# EAGLE board scheda_trasduttori (EAGLE 6.5.0)
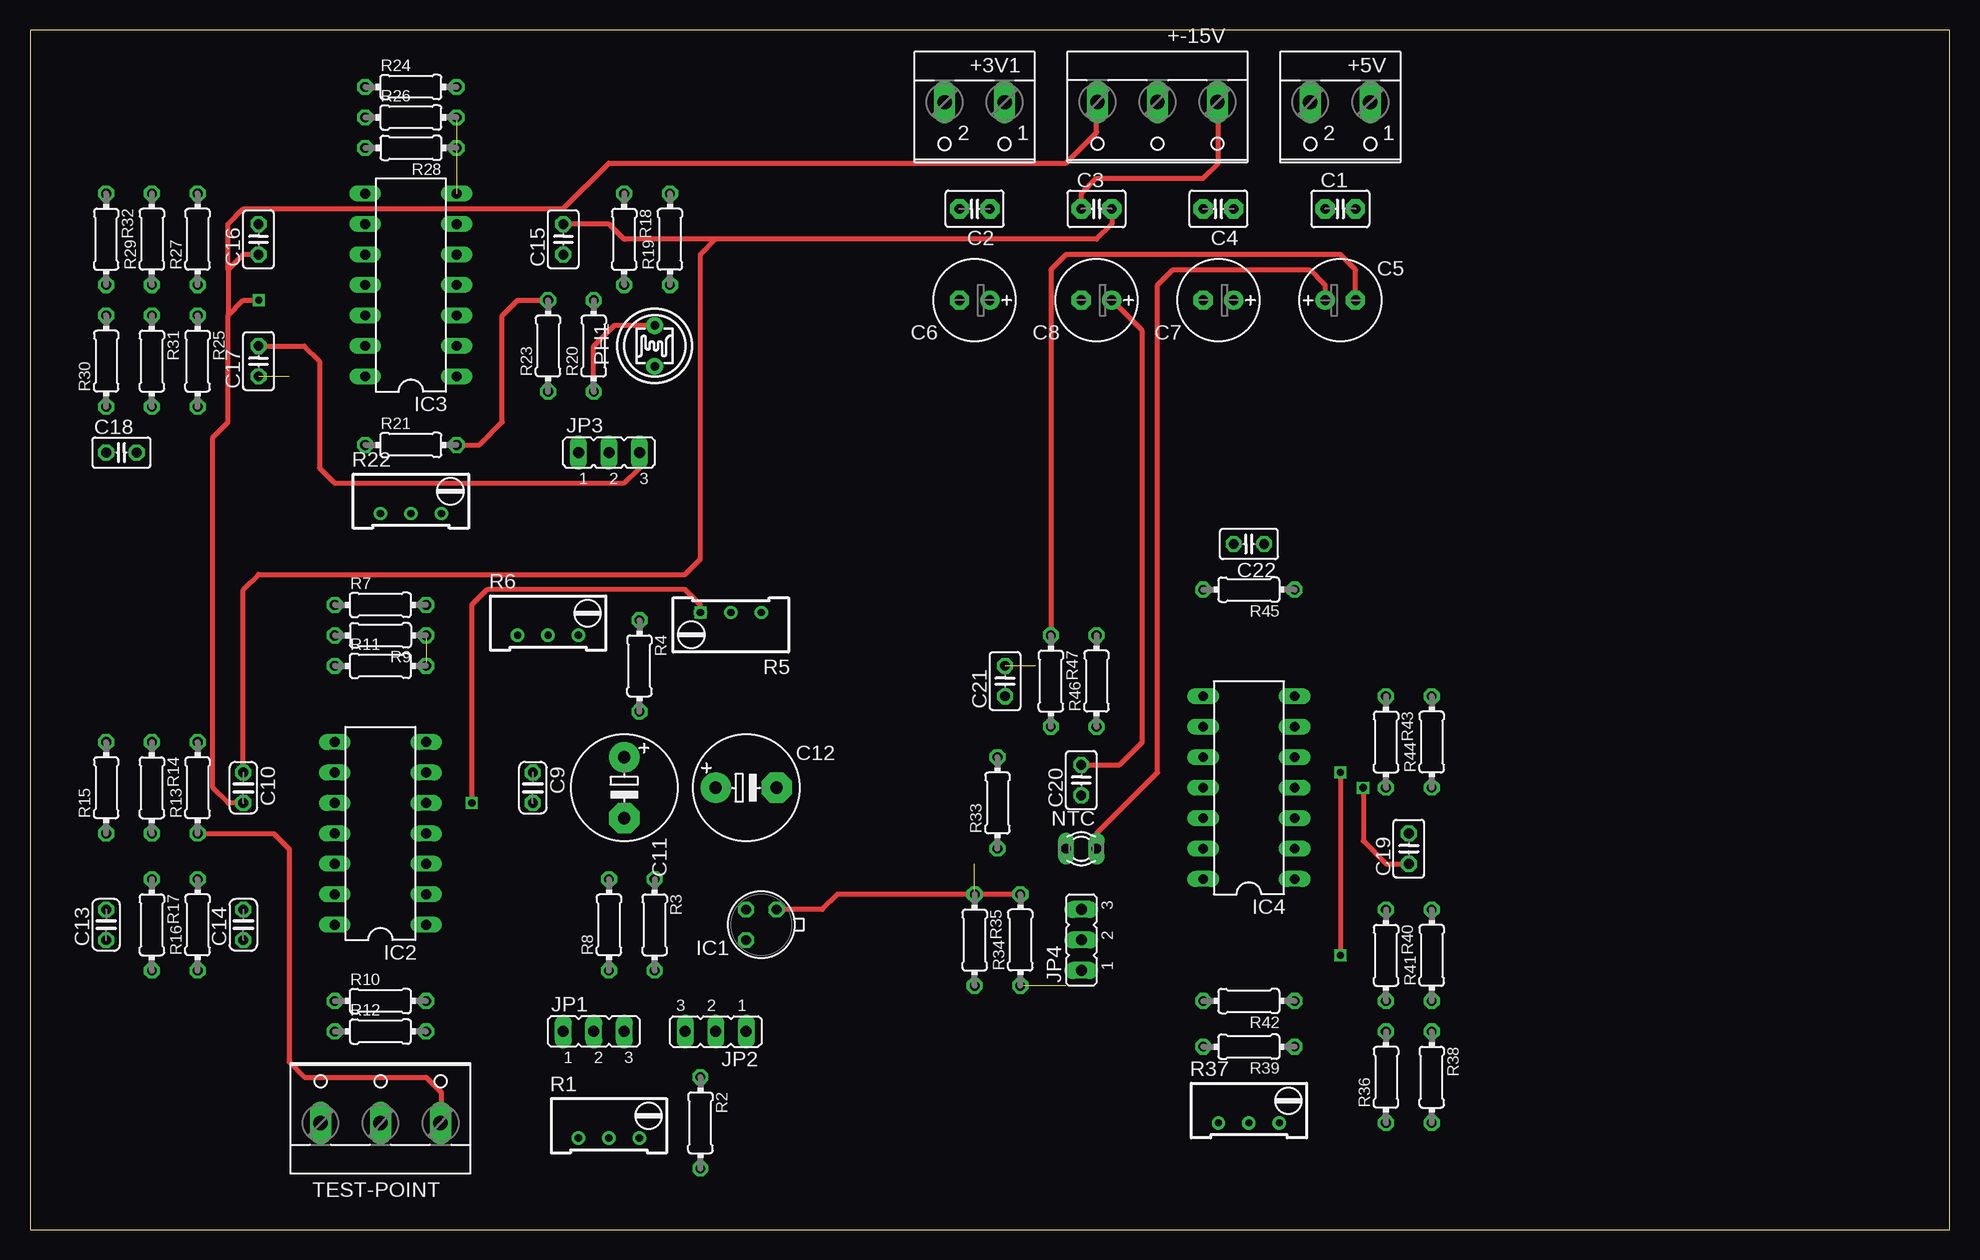
[diagram p0: board, top side]
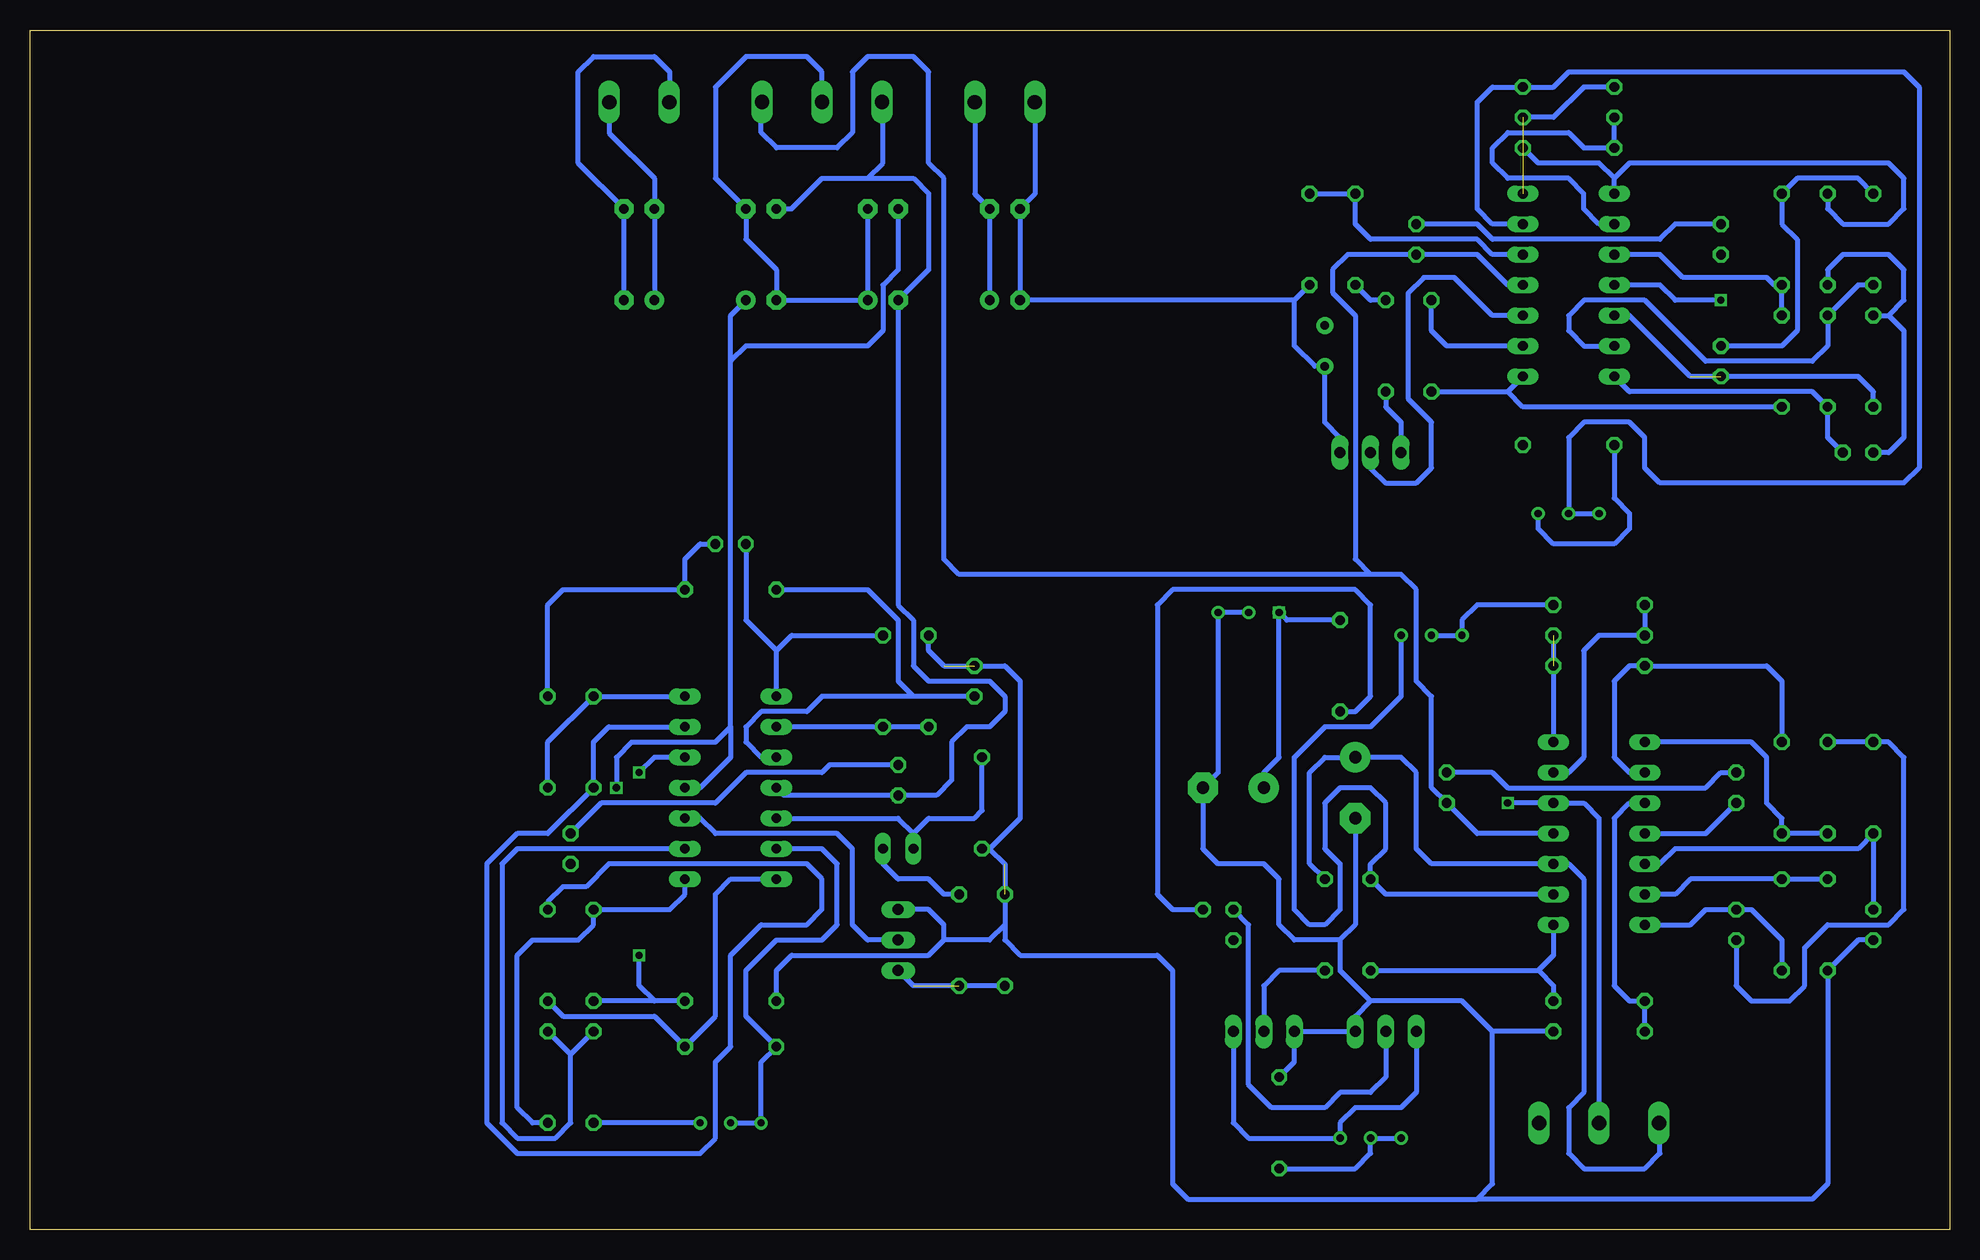
[diagram p1: board, bottom side, seen from below]

Size 160 x 100 mm. Coordinates in mm from the lower left corner, seen from the top.
Outline: 0,0 160,0 160,100 0,100 0,0
Copper layers (1*16): Top 0.035mm / dielectric 1.5mm / Bottom 0.035mm
Design rules "default": minimum track width 10mil, minimum drill 24mil, track to track 8mil, track to pad 8mil, pad to pad 8mil, via to via 8mil, smd to smd 8mil, copper to edge 40mil, drill to drill 8mil, minimum pad ring 10mil, minimum via ring 8mil, stop-mask expansion 4mil, vias tented up to drill 0mil, thermal gap 10mil

## Footprints (pad centres in the part's own frame; a part is rotated, then mirrored left to right if it is on the bottom)
W237-102 = drill 1.194 long: 1 -2.5,-1.27; 2 2.5,-1.27
W237-103 = drill 1.194 long: 1 -5,-1.29; 2 0,-1.29; 3 5,-1.29
C2.5-3 = drill 0.813 pad 1.6 octagon: 1 -1.27,0; 2 1.27,0
E2,5-7 = drill 0.813 pad 1.6: + -1.27,0 | drill 0.813 pad 1.6 octagon: - 1.27,0
C025-024X044 = drill 0.813 octagon: 1 -1.27,0; 2 1.27,0
E5-8,5 = drill 1.016 pad 2.54: + -2.54,0 | drill 1.016 pad 2.54 octagon: - 2.54,0
C025-025X050 = drill 0.813 octagon: 1 -1.27,0; 2 1.27,0
TO18 = drill 0.813 octagon: 1 -1.27,-1.27; 2 1.27,-1.27; 3 1.27,1.27
DIL14 = drill 0.813 long: 1 -7.62,-3.81; 2 -5.08,-3.81; 3 -2.54,-3.81; 4 0,-3.81; 5 2.54,-3.81; 6 5.08,-3.81; 7 7.62,-3.81; 8 7.62,3.81; 9 5.08,3.81; 10 2.54,3.81; 11 0,3.81; 12 -2.54,3.81; 13 -5.08,3.81; 14 -7.62,3.81
JP2 = drill 0.914 long: 1 -2.54,0; 2 0,0; 3 2.54,0
P640 = drill 0.813 long: 1 -1.27,0; 2 1.27,0
T0-46-A10XX = drill 0.7 pad 1.4: 1 -1.7,0; 2 1.7,0
RTRIM64W = drill 0.61: 1 1.27,-2.54; 2 1.27,0; 3 1.27,2.54
0204/7 = drill 0.813 octagon: 1 -3.81,0; 2 3.81,0

## Placement (x,y rotation side)
+3V1  [W237-102]  78.74,92.71 180 top
+5V  [W237-102]  109.22,92.71 180 top
+-15V  [W237-103]  93.98,92.71 180 top
C1  100n  [C2.5-3]  109.22,85.09 0 top
C2  100n  [C2.5-3]  78.74,85.09 180 top
C3  100n  [C2.5-3]  88.9,85.09 0 top
C4  100n  [C2.5-3]  99.06,85.09 180 top
C5  100u  [E2,5-7]  109.22,77.47 0 top
C6  100u  [E2,5-7]  78.74,77.47 180 top
C7  100u  [E2,5-7]  99.06,77.47 180 top
C8  100u  [E2,5-7]  88.9,77.47 180 top
C9  100n  [C025-024X044]  41.91,36.83 270 top
C10  100n  [C025-024X044]  17.78,36.83 270 top
C11  1u  [E5-8,5]  49.53,36.83 270 top
C12  1u  [E5-8,5]  59.69,36.83 0 top
C13  100n  [C025-024X044]  6.35,25.4 90 top
C14  100n  [C025-024X044]  17.78,25.4 90 top
C15  100n  [C025-025X050]  44.45,82.55 90 top
C16  100n  [C025-025X050]  19.05,82.55 90 top
C17  3n3  [C025-025X050]  19.05,72.39 90 top
C18  3n3  [C025-025X050]  7.62,64.77 0 top
C19  100n  [C025-025X050]  114.94,31.75 90 top
C20  100n  [C025-025X050]  87.63,37.47 90 top
C21  100n  [C025-025X050]  81.28,45.72 90 top
C22  100n  [C025-025X050]  101.6,57.15 180 top
IC1  AD590H  [TO18]  60.96,25.4 180 top
IC2  TL084P  [DIL14]  29.21,33.02 90 top
IC3  TL084P  [DIL14]  31.75,78.74 90 top
IC4  TL084P  [DIL14]  101.6,36.83 90 top
JP1  [JP2]  46.99,16.51 0 top
JP2  [JP2]  57.15,16.51 180 top
JP3  [JP2]  48.26,64.77 0 top
JP4  [JP2]  87.63,24.13 90 top
NTC  10K  [P640]  87.63,31.75 0 top
PH1  GL55  [T0-46-A10XX]  52.07,73.66 270 top
R1  10K  [RTRIM64W]  48.26,8.89 270 top
R2  8K2  [0204/7]  55.88,8.89 270 top
R3  120K  [0204/7]  52.07,25.4 270 top
R4  82K  [0204/7]  50.8,46.99 270 top
R5  100K  [RTRIM64W]  58.42,50.16 90 top
R6  100K  [RTRIM64W]  43.18,50.8 270 top
R7  47K  [0204/7]  29.21,52.07 0 top
R8  120K  [0204/7]  48.26,25.4 90 top
R9  120K  [0204/7]  29.21,49.53 180 top
R10  82K  [0204/7]  29.21,19.05 0 top
R11  82K  [0204/7]  29.21,46.99 0 top
R12  82K  [0204/7]  29.21,16.51 0 top
R13  82K  [0204/7]  13.97,36.83 90 top
R14  82K  [0204/7]  10.16,36.83 270 top
R15  82K  [0204/7]  6.35,36.83 90 top
R16  56K  [0204/7]  13.97,25.4 90 top
R17  100K  [0204/7]  10.16,25.4 270 top
R18  4K7  [0204/7]  49.53,82.55 270 top
R19  10K  [0204/7]  53.34,82.55 90 top
R20  4K7  [0204/7]  46.99,73.66 90 top
R21  120K  [0204/7]  31.75,65.41 0 top
R22  47K  [RTRIM64W]  31.75,60.96 270 top
R23  18K  [0204/7]  43.18,73.66 90 top
R24  18K  [0204/7]  31.75,95.25 0 top
R25  47K  [0204/7]  13.97,72.39 270 top
R26  47K  [0204/7]  31.75,92.71 0 top
R27  47K  [0204/7]  13.97,82.55 90 top
R28  47K  [0204/7]  31.75,90.17 180 top
R29  47K  [0204/7]  10.16,82.55 90 top
R30  47K  [0204/7]  6.35,72.39 90 top
R31  56K  [0204/7]  10.16,72.39 270 top
R32  100K  [0204/7]  6.35,82.55 270 top
R33  6K8  [0204/7]  80.64,35.56 90 top
R34  220K  [0204/7]  82.55,24.13 90 top
R35  100K  [0204/7]  78.74,24.13 270 top
R36  82K  [0204/7]  113.03,12.7 90 top
R37  22K  [RTRIM64W]  101.6,10.16 270 top
R38  6K8  [0204/7]  116.84,12.7 270 top
R39  6K8  [0204/7]  101.6,15.24 180 top
R40  82K  [0204/7]  113.03,22.86 270 top
R41  82K  [0204/7]  116.84,22.86 90 top
R42  82K  [0204/7]  101.6,19.05 180 top
R43  82K  [0204/7]  113.03,40.64 270 top
R44  82K  [0204/7]  116.84,40.64 90 top
R45  82K  [0204/7]  101.6,53.34 180 top
R46  56K  [0204/7]  88.9,45.72 90 top
R47  100K  [0204/7]  85.09,45.72 270 top
TEST-POINT  [W237-103]  29.21,10.16 0 top

## Library data of the parts
+3V1 +5V = con-wago-500; MPN: 237-102; OC_FARNELL: unknown; OC_NEWARK: 70K9898
+-15V TEST-POINT = con-wago-500; MPN: 237-103; OC_FARNELL: unknown; OC_NEWARK: 18M7116
C1-C4 = capacitor-wima
C5-C22 R2-R4 R7-R21 R23-R32 = rcl
IC1-IC4 = linear
JP1-JP4 = jumper
NTC = ptc-ntc; OC_FARNELL: unknown; OC_NEWARK: unknown
PH1 = photo-elements; TYPE: GL55
R1 R5 R6 R22 R33-R47 = resistor

## Nets
+3V3: +3V1.1 C2.1 C6.+
+4.1V: R18.2 R20.2
+5V: +5V.1 C1.1 C5.+ IC1.1 NTC.2 R4.2 R34.2
+15V: +-15V.1 C3.1 C7.+ C9.2 C15.1 C19.1 IC2.4 IC3.4 IC4.4
-15V: +-15V.3 C4.2 C8.- C10.2 C16.1 C20.1 IC2.11 IC3.11 IC4.11
AGND: +-15V.2 C3.2 C4.1 C7.- C8.+ C9.1 C10.1 C15.2 C16.2 C19.2 C20.2
ANA-MUX-0: C14.2 IC2.14 R16.1
ANA-MUX-1: C18.2 IC3.14 R31.2
ANA-MUX-2: C22.2 IC4.8 R46.2
GND1: +3V1.2 C2.2 C6.- C17.2 JP3.3 PH1.2 R19.1 R27.2 R32.1
GND2: +5V.2 C1.2 C5.- C11.- C12.- C13.1 C21.2 JP1.3 JP2.3 JP4.3 R2.1 R5.1 R5.2 R12.2 R17.2 R33.1 R35.1 R42.2 R47.1
N$1: R1.1 R1.2 R2.2
N$2: IC1.2 JP1.2
N$3: R6.1 R6.2 R7.2
N$4: C11.+ IC2.3 R3.1 TEST-POINT.1
N$5: IC2.2 R6.3 R8.2
N$6: IC2.1 R8.1 R10.2
N$7: JP2.2 R3.2
N$8: JP1.1 JP2.1 R1.3
N$9: C12.+ IC2.5 R4.1 R5.3 TEST-POINT.2
N$10: IC2.6 R7.1 R9.2
N$11: IC2.7 R9.1 R11.2
N$12: IC2.10 R10.1 R12.1
N$13: IC2.9 R11.1 R13.2
N$14: IC2.8 R13.1 R14.2 TEST-POINT.3
N$15: IC3.5 R18.1 R19.2
N$16: C14.1 R14.1 R15.2
N$17: C13.2 IC2.12 R15.1
N$18: IC2.13 R16.2 R17.1
N$19: JP3.1 PH1.1 R20.1
N$20: R21.1 R22.3
N$21: IC3.6 R22.1 R22.2 R24.2
N$22: IC3.7 R24.1 R26.2
N$23: IC3.1 R23.1 R25.2
N$24: IC3.2 R21.2 R23.2
N$25: IC3.10 R25.1 R27.1
N$26: IC3.9 R26.1 R28.2
N$27: IC3.8 R28.1 R29.2
N$28: C17.1 IC3.12 R30.1
N$29: IC3.13 R31.1 R32.2
N$30: C18.1 R29.1 R30.2
N$31: IC3.3 JP3.2
N$32: C21.1 IC4.10 R45.2
N$33: IC4.9 R46.1 R47.2
N$34: C22.1 R44.2 R45.1
N$35: IC4.12 NTC.1 R33.2
N$36: R36.1 R37.3
N$37: IC4.2 R36.2 R38.1
N$38: IC4.1 R38.2 R40.1
N$39: IC4.13 R37.1 R37.2 R39.2
N$40: IC4.14 R39.1 R41.1
N$41: IC4.6 R41.2 R43.2
N$42: IC4.5 R40.2 R42.1
N$43: IC4.7 R43.1 R44.1
N$44: JP4.1 R34.1 R35.2
N$45: IC4.3 JP4.2

## Tracks (layer width: path | path; a pad name or v marks a point on that pad's centre or on a via)
+3V3
  Bottom 0.406: +3V1.1 81.24,86.32 C2.1 C6.+
+4.1V
  Bottom 0.406: R20.2 48.26,77.47 R18.2
+5V
  Top 0.406: NTC.2 88.9,33.02 93.98,38.1 93.98,78.74 95.25,80.01 106.68,80.01 107.95,78.74 C5.+ | R34.2 67.31,27.94 66.04,26.67 IC1.1
  Bottom 0.406: C5.+ C1.1 107.95,87.63 111.72,91.4 +5V.1 | R34.2 83.82,27.94 85.09,29.21 87.63,29.21 88.9,30.48 NTC.2 | R4.2 49.53,43.18 48.26,44.45 48.26,52.07 49.53,53.34 64.77,53.34 66.04,52.07 66.04,27.94 64.77,26.67 IC1.1
+15V  (via drill 0.6)
  Top 0.406: v111.12,36.83 111.12,32.38 113.03,30.48 C19.1 | C3.1 87.63,86.36 88.9,87.63 97.79,87.63 99.06,88.9 99.06,93.92 +-15V.1
  Bottom 0.406: 101.6,72.39 101.6,76.2 C7.+ | C3.1 87.63,80.01 88.9,78.74 88.9,74.93 90.17,73.66 100.33,73.66 101.6,72.39 | IC4.4 104.14,36.83 101.6,39.37 101.6,41.91 | v111.12,36.83 111.12,39.37 109.86,40.64 102.87,40.64 101.6,41.91 | 101.6,41.91 101.6,72.39 | IC2.4 39.37,33.02 C9.2 43.18,36.83 43.18,44.45 44.45,45.72 44.45,53.34 45.72,54.61 48.26,54.61 | 48.26,54.61 82.55,54.61 83.82,55.88 83.82,87.63 85.09,88.9 85.09,96.52 86.36,97.79 90.17,97.79 91.44,96.52 91.44,91.44 92.71,90.17 97.79,90.17 99.06,91.44 99.06,93.92 +-15V.1 | IC3.4 36.83,78.74 39.37,81.28 C15.1 50.16,81.28 51.44,80.01 51.44,78.11 49.53,76.2 49.53,55.88 48.26,54.61
-15V  (via drill 0.6)
  Top 0.406: 16.51,76.2 16.51,67.31 15.24,66.04 15.24,36.83 16.51,35.56 C10.2 | 16.51,76.2 17.78,77.47 v19.05,77.47 | C16.1 17.78,81.28 16.51,80.01 | 16.51,80.01 16.51,76.2 | 16.51,80.01 16.51,83.82 17.78,85.09 44.45,85.09 48.26,88.9 86.36,88.9 88.9,91.44 88.9,93.92 +-15V.3
  Bottom 0.406: IC4.11 97.16,36.2 C20.1 84.45,36.2 83.19,37.47 83.19,40.64 81.92,41.91 80.01,41.91 78.74,43.18 78.74,44.45 80.01,45.72 85.09,45.72 86.36,46.99 86.36,50.8 87.63,52.07 C8.- 85.09,80.01 85.09,86.36 86.36,87.63 90.17,87.63 | C4.2 96.52,85.09 93.98,87.63 90.17,87.63 | 90.17,87.63 88.9,88.9 88.9,93.92 +-15V.3 | v19.05,77.47 22.86,77.47 24.13,78.74 IC3.11 | IC2.11 20.32,33.02 C10.2
  other vias: 87.63,36.2 17.78,35.56
AGND  (via drill 0.6)
  Top 0.406: C20.2 90.81,38.73 92.71,40.64 92.71,74.93 C8.+ | C3.2 90.17,83.82 88.9,82.55 57.15,82.55 | 57.15,82.55 49.53,82.55 48.26,83.82 C15.2 | C10.1 17.78,53.34 19.05,54.61 54.61,54.61 55.88,55.88 55.88,81.28 57.15,82.55
  Bottom 0.406: C20.2 93.34,38.73 93.98,38.1 100.33,38.1 102.87,35.56 112.39,35.56 C19.2 | C3.2 C8.+ C7.- 97.79,80.01 100.33,82.55 C4.1 102.87,87.63 102.87,95.25 100.33,97.79 95.25,97.79 93.98,96.52 +-15V.2 | C9.1 38.1,38.1 36.83,36.83 20.32,36.83 19.05,38.1 C10.1 | C16.2 22.86,83.82 24.13,82.55 38.1,82.55 39.37,83.82 C15.2
  other vias: 17.78,38.1
ANA-MUX-0
  Bottom 0.406: IC2.14 21.59,25.4 20.32,26.67 C14.2 16.51,26.67 13.97,24.13 R16.1
ANA-MUX-1
  Bottom 0.406: C18.2 10.16,66.04 R31.2 11.43,69.85 26.67,69.85 IC3.14
ANA-MUX-2
  Bottom 0.406: IC4.8 97.79,48.26 | 97.79,48.26 96.52,49.53 R46.2 | C22.2 100.33,50.8 97.79,48.26
GND1
  Top 0.406: C17.2 22.86,73.66 24.13,72.39 24.13,63.5 25.4,62.23 49.53,62.23 50.8,63.5 JP3.3
  Bottom 0.406: +3V1.2 76.24,86.32 C2.2 C6.- 54.61,77.47 | R32.1 7.62,87.63 12.7,87.63 R27.2 13.97,83.82 12.7,82.55 12.7,74.93 13.97,73.66 C17.2 | JP3.3 50.8,66.04 52.07,67.31 PH1.2 52.91,71.96 54.61,73.66 54.61,77.47 | 54.61,77.47 R19.1
GND2  (2 unrouted)
  Top 0.406: C5.- 110.49,80.01 109.22,81.28 86.36,81.28 85.09,80.01 R47.1
  Bottom 0.406: R47.1 85.09,48.26 83.82,46.99 78.74,46.99 77.47,45.72 77.47,34.29 80.01,31.75 | R33.1 80.01,31.75 | 80.01,31.75 78.74,30.48 78.74,25.4 | C5.- C1.2 114.3,88.9 114.3,96.52 113.03,97.79 107.95,97.79 106.68,96.52 106.68,94.02 +5V.2 | R42.2 97.79,21.59 96.52,22.86 85.09,22.86 83.82,24.13 | 83.82,24.13 83.82,25.4 85.09,26.67 JP4.3 | 78.74,25.4 80.01,24.13 83.82,24.13 | R2.1 54.61,13.97 JP2.3 JP1.3 49.53,17.78 48.26,19.05 | R12.2 38.1,16.51 | 38.1,16.51 40.64,19.05 48.26,19.05 | R5.2 R5.1 60.96,38.1 C12.- 62.23,31.75 60.96,30.48 57.15,30.48 55.88,29.21 55.88,25.4 54.61,24.13 50.8,24.13 | C11.- 49.53,25.4 50.8,24.13 | 48.26,19.05 50.8,21.59 50.8,24.13 | 78.74,25.4 78.74,24.13 77.47,22.86 66.04,22.86 64.77,21.59 64.77,3.81 63.5,2.54 39.37,2.54 | 39.37,2.54 38.1,3.81 38.1,16.51 | C13.1 7.62,24.13 R17.2 10.16,3.81 11.43,2.54 39.37,2.54
N$1
  Bottom 0.406: R2.2 49.53,5.08 48.26,6.35 R1.2 R1.1
N$2
  Bottom 0.406: JP1.2 46.99,12.7 48.26,11.43 50.8,11.43 52.07,10.16 56.52,10.16 58.42,12.06 58.42,25.4 IC1.2
N$3
  Bottom 0.406: R6.2 R6.1 40.64,50.8 39.37,52.07 R7.2
N$4
  Bottom 0.406: R3.1 53.34,30.48 53.34,38.1 52.07,39.37 C11.+ 45.72,39.37 44.45,38.1 44.45,31.75 43.18,30.48 IC2.3 31.75,30.48 30.48,29.21 30.48,11.43 31.75,10.16 31.75,6.35 30.48,5.08 25.4,5.08 24.13,6.35 24.13,8.89 24.19,8.89 TEST-POINT.1 24.21,7.54
N$5
  Bottom 0.406: IC2.2 46.99,27.94 R8.2 48.26,30.48 46.99,31.75 46.99,35.56 48.26,36.83 50.8,36.83 52.07,35.56 52.07,31.75 50.8,30.48 50.8,26.67 52.07,25.4 53.34,25.4 54.61,26.67 54.61,39.37 52.07,41.91 48.26,41.91 45.72,44.45 R6.3
N$6
  Bottom 0.406: R8.1 34.29,21.59 | 34.29,21.59 33.02,20.32 R10.2 | IC2.1 33.02,22.86 34.29,21.59
N$7
  Bottom 0.406: R3.2 55.88,21.59 57.15,20.32 JP2.2
N$8
  Bottom 0.406: JP1.1 44.45,11.43 45.72,10.16 49.53,10.16 50.8,8.89 R1.3 58.42,7.62 59.69,8.89 JP2.1
N$9  (via drill 0.6)
  Top 0.406: R5.3 55.88,52.07 54.61,53.34 38.1,53.34 36.83,52.07 v36.83,35.56
  Bottom 0.406: C12.+ 57.15,38.1 55.88,39.37 R5.3 55.24,50.8 R4.1 | TEST-POINT.2 29.21,34.29 30.48,35.56 IC2.5 v36.83,35.56
  other vias: 55.88,51.44
N$10
  Bottom 0.406: R7.1 R9.2 29.21,49.53 30.48,48.26 30.48,39.37 31.75,38.1 IC2.6
N$11  (1 unrouted)
  Bottom 0.406: R9.1 IC2.7
N$12
  Bottom 0.406: R12.1 R10.1 26.67,19.05 27.94,20.32 27.94,34.29 26.67,35.56 IC2.10
N$13
  Bottom 0.406: R13.2 13.97,45.72 15.24,46.99 R11.1 26.67,46.99 27.94,45.72 27.94,39.37 26.67,38.1 IC2.9
N$14
  Top 0.406: R13.1 20.32,33.02 21.59,31.75 21.59,13.97 22.86,12.7 33.02,12.7 34.29,11.43 34.29,8.95 TEST-POINT.3
  Bottom 0.406: IC2.8 16.51,40.64 15.24,39.37 15.24,35.56 13.97,34.29 R13.1 R14.2
N$15
  Bottom 0.406: R19.2 R18.1 49.53,83.82 48.26,82.55 39.37,82.55 38.1,81.28 IC3.5
N$16
  Bottom 0.406: R14.1 R15.2 5.08,40.64 3.81,39.37 3.81,26.67 5.08,25.4 10.16,25.4 12.06,23.5 12.06,20.32 13.34,19.05 16.51,19.05 17.78,20.32 C14.1
N$17
  Bottom 0.406: C13.2 R15.1 7.62,31.75 22.86,31.75 24.13,30.48 IC2.12
N$18
  Bottom 0.406: R17.1 R16.2 21.59,29.21 22.86,27.94 IC2.13
N$19
  Top 0.406: PH1.1 48.69,75.36 46.99,73.66 R20.1
  Bottom 0.406: R20.1 46.99,68.58 45.72,67.31 JP3.1
N$20
  Bottom 0.406: R21.1 27.94,60.96 26.67,59.69 26.67,58.42 27.94,57.15 33.02,57.15 34.29,58.42 R22.3
N$21
  Bottom 0.406: R22.1 R22.2 31.75,66.04 30.48,67.31 26.67,67.31 25.4,66.04 25.4,63.5 24.13,62.23 3.81,62.23 2.54,63.5 2.54,95.25 3.81,96.52 31.75,96.52 33.02,95.25 R24.2 38.1,95.25 39.37,93.98 39.37,85.09 38.1,83.82 IC3.6
N$22  (1 unrouted)
  Bottom 0.406: R24.1 30.48,95.25 33.02,92.71 R26.2
N$23
  Bottom 0.406: R23.1 36.83,69.85 | 36.83,69.85 IC3.1 | R25.2 35.56,68.58 36.83,69.85
N$24
  Top 0.406: R21.2 37.47,65.41 39.37,67.31 39.37,76.2 40.64,77.47 R23.2
  Bottom 0.406: IC3.2 41.91,73.66 43.18,74.93 R23.2
N$25
  Bottom 0.406: R25.1 R27.1 14.61,78.74 15.24,79.38 22.23,79.38 24.13,81.28 IC3.10
N$26
  Bottom 0.406: IC3.9 29.21,83.82 30.48,85.09 30.48,86.36 31.75,87.63 36.83,87.63 38.1,88.9 38.1,90.17 36.83,91.44 31.75,91.44 30.48,90.17 R28.2 R26.1
N$27
  Bottom 0.406: R29.2 10.16,85.09 8.89,83.82 5.08,83.82 3.81,85.09 3.81,87.63 5.08,88.9 26.67,88.9 27.94,87.63 | IC3.8 27.94,87.63 | 27.94,87.63 29.21,88.9 34.29,88.9 R28.1
N$28  (1 unrouted)
  Bottom 0.406: R30.1 6.35,69.85 7.62,71.12 21.59,71.12 26.67,76.2 IC3.12
N$29
  Bottom 0.406: R32.2 7.62,78.74 R31.1 10.16,73.66 11.43,72.39 20.32,72.39 25.4,77.47 30.48,77.47 31.75,76.2 31.75,74.93 30.48,73.66 IC3.13
N$30
  Bottom 0.406: 5.08,76.2 3.81,74.93 3.81,66.04 5.08,64.77 C18.1 | R30.2 5.08,76.2 | 5.08,76.2 3.81,77.47 3.81,80.01 5.08,81.28 8.89,81.28 10.16,80.01 R29.1
N$31
  Bottom 0.406: JP3.2 48.26,63.5 46.99,62.23 44.45,62.23 43.18,63.5 43.18,67.31 45.09,69.22 45.09,78.11 43.81,79.38 41.27,79.38 38.1,76.2 IC3.3
N$32
  Bottom 0.406: C21.1 86.36,44.45 | 86.36,44.45 93.98,44.45 95.25,43.18 99.06,43.18 100.33,41.91 100.33,40.64 99.06,39.37 IC4.10 | R45.2 90.17,53.34 87.63,50.8 87.63,45.72 86.36,44.45
N$33
  Bottom 0.406: IC4.9 R46.1 R47.2
N$34
  Bottom 0.406: R44.2 116.84,52.07 115.57,53.34 R45.1 105.41,55.88 104.14,57.15 C22.1
N$35
  Bottom 0.406: IC4.12 87.63,34.29 86.36,33.02 | NTC.1 86.36,33.02 | 86.36,33.02 85.09,34.29 81.28,34.29 80.64,34.92 R33.2
N$36
  Bottom 0.406: R37.3 R36.1
N$37
  Bottom 0.406: IC4.2 119.38,31.75 120.65,30.48 120.65,8.89 119.38,7.62 116.2,7.62 114.94,8.89 114.94,14.61 | 114.94,14.61 R38.1 | R36.2 114.94,14.61
N$38
  Bottom 0.406: R38.2 118.11,8.89 119.38,10.16 119.38,22.86 118.11,24.13 114.3,24.13 113.03,25.4 R40.1 106.68,26.67 105.41,27.94 IC4.1
N$39
  Bottom 0.406: R37.2 R37.1 99.06,13.97 R39.2 100.33,17.78 100.33,21.59 97.79,24.13 93.98,24.13 92.71,25.4 92.71,30.48 93.98,31.75 IC4.13
N$40
  Bottom 0.406: 99.06,29.21 IC4.14 101.6,29.21 102.87,27.94 102.87,17.78 R39.1 107.95,17.78 115.57,17.78 R41.1
N$41
  Bottom 0.406: IC4.6 111.76,41.91 113.03,40.64 R43.2 116.84,33.02 119.38,33.02 121.92,30.48 121.92,8.89 119.38,6.35 104.14,6.35 102.87,7.62 102.87,13.97 101.6,15.24 101.6,22.86 99.06,25.4 95.25,25.4 93.98,26.67 93.98,29.21 95.25,30.48 111.76,30.48 113.67,28.57 115.57,28.57 116.84,27.3 R41.2
N$42  (via drill 0.6)
  Top 0.406: v109.22,38.1 v109.22,22.86
  Bottom 0.406: R40.2 R42.1 107.95,19.05 109.22,20.32 v109.22,22.86 | IC4.5 107.95,39.37 v109.22,38.1
N$43
  Bottom 0.406: IC4.7 R43.1 116.84,40.64 R44.1
N$44  (1 unrouted)
  Bottom 0.406: R35.2 86.36,20.32 JP4.1
N$45
  Bottom 0.406: IC4.3 104.14,34.29 102.87,33.02 92.71,33.02 91.44,31.75 91.44,25.4 90.17,24.13 JP4.2